# EAGLE board MCB-K64F-v1.0.0 (EAGLE 7.7.0)
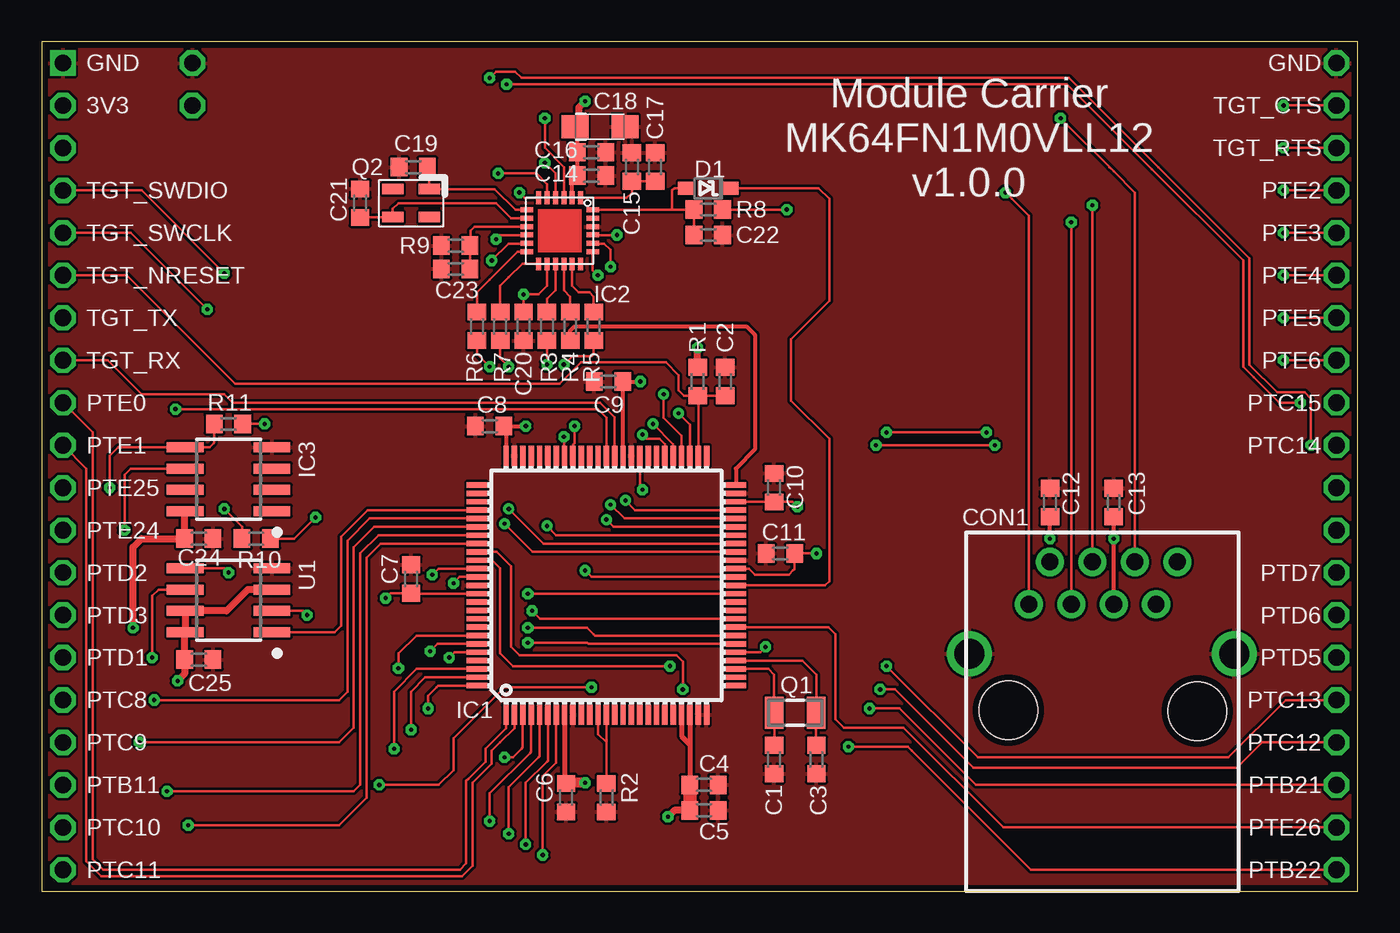
[diagram p0: board, top side]
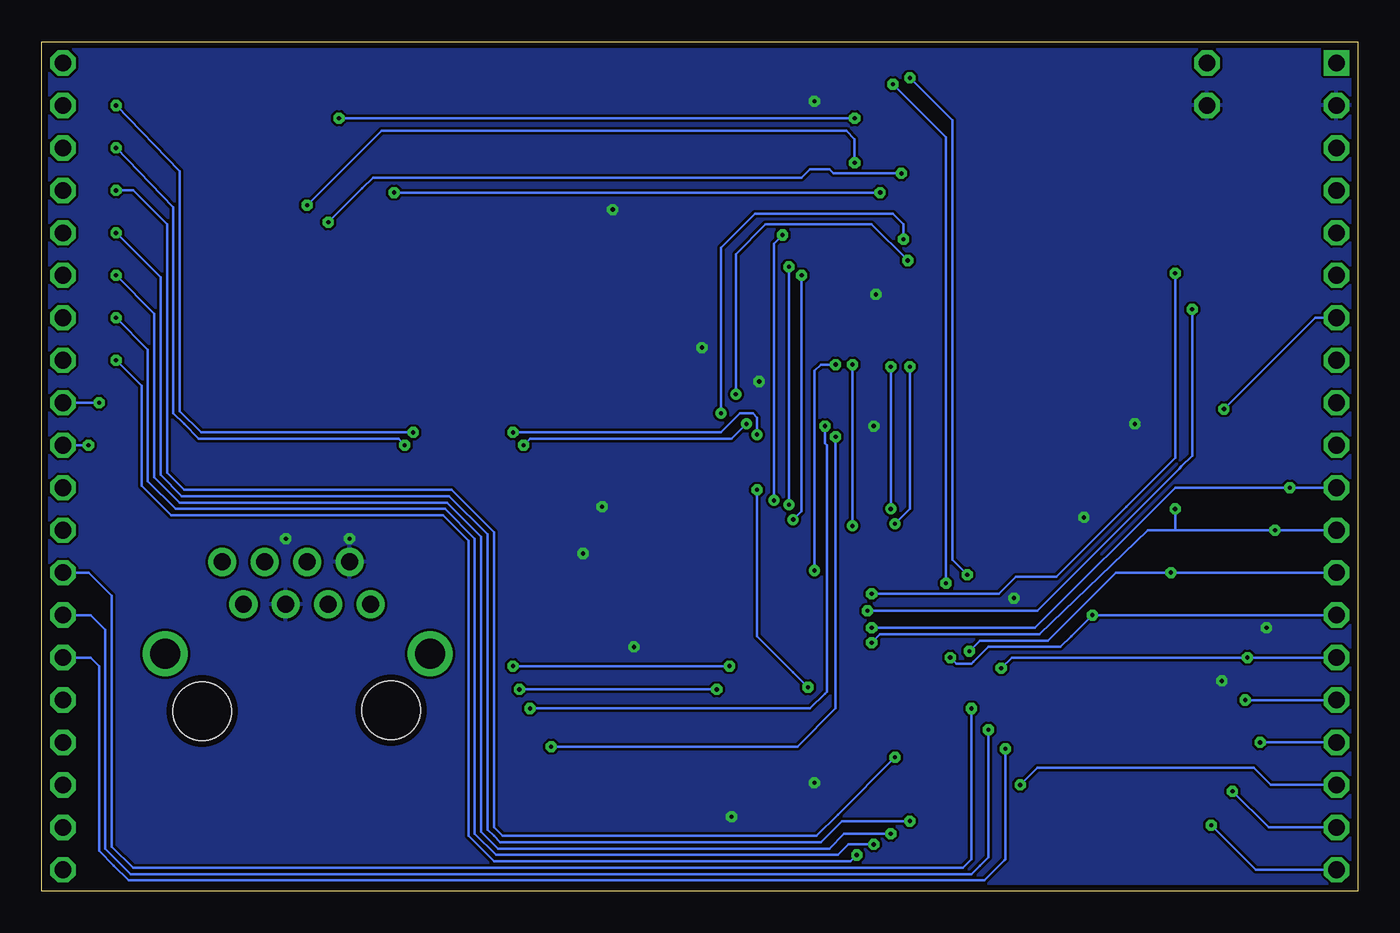
[diagram p1: board, bottom side, seen from below]

Size 78.74 x 50.8 mm. Coordinates in mm from the lower left corner, seen from the top.
Copper layers ((1*16)): Top 0.035mm / dielectric 0.8mm / Bottom 0.035mm
Design rules "mbed-HDK-6-6-2-layer": minimum track width 6mil, minimum drill 9mil, track to track 6mil, track to pad 6mil, pad to pad 6mil, via to via 6mil, smd to smd 6mil, copper to edge 15mil, drill to drill 8mil, minimum pad ring 10mil, minimum via ring 8mil, stop-mask expansion 4mil, vias tented up to drill 0mil, thermal gap 6mil

## Footprints (pad centres in the part's own frame; a part is rotated, then mirrored left to right if it is on the bottom)
0603 = smd 1 x 1.1: 1 -0.85,0; 2 0.85,0
SMC_A = smd 1.6 x 1.4: + -1.5,0; - 1.5,0
RJ45 = drill 1.016 pad 1.676: 1 0,0; 2 -1.27,-2.54; 3 -2.54,0; 4 -3.81,-2.54; 5 -5.08,0; 6 -6.35,-2.54; 7 -7.62,0; 8 -8.89,-2.54 | drill 1.778: P$1 -12.3,2.95; P$2 3.55,2.95 | hole 3.5: -10.09,6.38; 1.21,6.33
BAT60A = smd 1 x 0.8: A 1.3,0; K -1.3,0
LQFP100 = smd 1.2 x 0.32: 1 -7.75,6; 2 -7.75,5.5; 3 -7.75,5; 4 -7.75,4.5; 5 -7.75,4; 6 -7.75,3.5; 7 -7.75,3; 8 -7.75,2.5; 9 -7.75,2; 10 -7.75,1.5; 11 -7.75,1; 12 -7.75,0.5; 13 -7.75,0; 14 -7.75,-0.5; 15 -7.75,-1; 16 -7.75,-1.5; 17 -7.75,-2; 18 -7.75,-2.5; 19 -7.75,-3; 20 -7.75,-3.5; 21 -7.75,-4; 22 -7.75,-4.5; 23 -7.75,-5; 24 -7.75,-5.5; 25 -7.75,-6; 51 7.75,-6; 52 7.75,-5.5; 53 7.75,-5; 54 7.75,-4.5; 55 7.75,-4; 56 7.75,-3.5; 57 7.75,-3; 58 7.75,-2.5; 59 7.75,-2; 60 7.75,-1.5; 61 7.75,-1; 62 7.75,-0.5; 63 7.75,0; 64 7.75,0.5; 65 7.75,1; 66 7.75,1.5; 67 7.75,2; 68 7.75,2.5; 69 7.75,3; 70 7.75,3.5; 71 7.75,4; 72 7.75,4.5; 73 7.75,5; 74 7.75,5.5; 75 7.75,6 | smd 0.32 x 1.2: 26 -6,-7.75; 27 -5.5,-7.75; 28 -5,-7.75; 29 -4.5,-7.75; 30 -4,-7.75; 31 -3.5,-7.75; 32 -3,-7.75; 33 -2.5,-7.75; 34 -2,-7.75; 35 -1.5,-7.75; 36 -1,-7.75; 37 -0.5,-7.75; 38 0,-7.75; 39 0.5,-7.75; 40 1,-7.75; 41 1.5,-7.75; 42 2,-7.75; 43 2.5,-7.75; 44 3,-7.75; 45 3.5,-7.75; 46 4,-7.75; 47 4.5,-7.75; 48 5,-7.75; 49 5.5,-7.75; 50 6,-7.75; 76 6,7.75; 77 5.5,7.75; 78 5,7.75; 79 4.5,7.75; 80 4,7.75; 81 3.5,7.75; 82 3,7.75; 83 2.5,7.75; 84 2,7.75; 85 1.5,7.75; 86 1,7.75; 87 0.5,7.75; 88 0,7.75; 89 -0.5,7.75; 90 -1,7.75; 91 -1.5,7.75; 92 -2,7.75; 93 -2.5,7.75; 94 -3,7.75; 95 -3.5,7.75; 96 -4,7.75; 97 -4.5,7.75; 98 -5,7.75; 99 -5.5,7.75; 100 -6,7.75
QFN-24 = smd 0.75 x 0.3: 1 -1.975,1.25; 2 -1.975,0.75; 3 -1.975,0.25; 4 -1.975,-0.25; 5 -1.975,-0.75; 6 -1.975,-1.25; 13 1.975,-1.25; 14 1.975,-0.75; 15 1.975,-0.25; 16 1.975,0.25; 17 1.975,0.75; 18 1.975,1.25 | smd 0.3 x 0.75: 7 -1.25,-1.975; 8 -0.75,-1.975; 9 -0.25,-1.975; 10 0.25,-1.975; 11 0.75,-1.975; 12 1.25,-1.975; 19 1.25,1.975; 20 0.75,1.975; 21 0.25,1.975; 22 -0.25,1.975; 23 -0.75,1.975; 24 -1.25,1.975
SO8 = smd 0.6 x 2.2: 1 -1.905,-2.6; 2 -0.635,-2.6; 3 0.635,-2.6; 4 1.905,-2.6; 5 1.905,2.6; 6 0.635,2.6; 7 -0.635,2.6; 8 -1.905,2.6
MODULE_DAUGHTER = drill 1 square: 1 0,0 | drill 1 octagon: 2 0,-2.54; 3 0,-5.08; 4 0,-7.62; 5 0,-10.16; 6 0,-12.7; 7 0,-15.24; 8 0,-17.78; 9 0,-20.32; 10 0,-22.86; 11 0,-25.4; 12 0,-27.94; 13 0,-30.48; 14 0,-33.02; 15 0,-35.56; 16 0,-38.1; 17 0,-40.64; 18 0,-43.18; 19 0,-45.72; 20 0,-48.26; 21 76.2,-48.26; 22 76.2,-45.72; 23 76.2,-43.18; 24 76.2,-40.64; 25 76.2,-38.1; 26 76.2,-35.56; 27 76.2,-33.02; 28 76.2,-30.48; 29 76.2,-27.94; 30 76.2,-25.4; 31 76.2,-22.86; 32 76.2,-20.32; 33 76.2,-17.78; 34 76.2,-15.24; 35 76.2,-12.7; 36 76.2,-10.16; 37 76.2,-7.62; 38 76.2,-5.08; 39 76.2,-2.54; 40 76.2,0
FC135 = smd 1.1 x 1.9: X1 -1.25,0; X2 1.25,0
3.2X.2.5 = smd 1.27 x 0.635: P$1 -1.092,-0.838; P$2 1.092,-0.838; P$3 1.092,0.838; P$4 -1.092,0.838
TP50-PTH = drill 1 octagon: TP 0,0

## Placement (x,y rotation side)
C1  18pF  [0603]  43.82,7.87 270 top
C2  100nF  [0603]  40.89,30.48 90 top
C3  18pF  [0603]  46.36,7.87 270 top
C4  100nF  [0603]  39.62,6.35 0 top
C5  100nF  [0603]  39.62,4.83 0 top
C6  100nF  [0603]  31.37,5.59 270 top
C7  100nF  [0603]  22.1,18.67 90 top
C8  100nF  [0603]  26.8,27.81 180 top
C9  100nF  [0603]  33.91,30.48 180 top
C10  100nF  [0603]  43.82,24.13 90 top
C11  100nF  [0603]  44.2,20.19 180 top
C12  100nF  [0603]  60.33,23.24 90 top
C13  100nF  [0603]  64.14,23.24 90 top
C14  100nF  [0603]  32.89,42.8 0 top
C15  100nF  [0603]  35.31,43.31 90 top
C16  100nF  [0603]  32.89,44.2 0 top
C17  100nF  [0603]  36.7,43.31 90 top
C18  4uF7  [SMC_A]  33.4,45.72 0 top
C19  24pF  [0603]  22.22,43.31 180 top
C20  100nF  [0603]  28.83,33.78 270 top
C21  24pF  [0603]  19.05,41.15 90 top
C22  100nF  [0603]  39.88,39.24 0 top
C23  100pF  [0603]  24.77,37.21 180 top
C24  100nF  [0603]  9.4,21.08 0 top
C25  100nF  [0603]  9.4,13.84 0 top
CON1  SI-60002-F  [RJ45]  59.05,17.15 180 top
D1  BAT60A  [BAT60A]  39.88,42.04 180 top
IC1  MK64FN1M0VLL12  [LQFP100]  33.78,18.29 90 top
IC2  KSZ8081RNACA  [QFN-24]  30.99,39.5 270 top
IC3  ATECC608A  [SO8]  11.18,24.64 90 top
MOD1  MODULE_DAUGHTER  [MODULE_DAUGHTER]  1.27,49.53 0 top
Q1  32.768kHz  [FC135]  45.09,10.67 0 top
Q2  25MHz  [3.2X.2.5]  22.1,41.15 180 top
R1  10k  [0603]  39.24,30.48 90 top
R2  10k  [0603]  33.78,5.59 270 top
R3  33R  [0603]  30.23,33.78 270 top
R4  33R  [0603]  31.62,33.78 270 top
R5  33R  [0603]  33.02,33.78 270 top
R6  33R  [0603]  26.04,33.78 270 top
R7  33R  [0603]  27.43,33.78 270 top
R8  10k  [0603]  39.88,40.77 0 top
R9  6k49  [0603]  24.77,38.61 0 top
R10  4k7  [0603]  12.83,21.08 0 top
R11  4k7  [0603]  11.18,27.94 0 top
SS1  FLOSSICORN0.5  [FLOSSICORN-0.5]  13.72,1.91 0 top
TP3  TEST-POINT-50R-PTH  [TP50-PTH]  9.02,49.53 0 top
TP5  TEST-POINT-50R-PTH  [TP50-PTH]  9.02,46.99 0 top
U1  MX25R3235FM1IH0  [SO8]  11.18,17.4 90 top

## Library data of the parts
C1-C23 D1 IC1 IC2 Q1 Q2 R1-R9 TP3 TP5 = mbed-HDK
C24 C25 R10 R11 = mbed-HDK-RLC
CON1 = mbed-HDK-Connector; MF: Stewart Connector; MFN: SI-60002-F; OC-DIGIKEY: 380-1105-ND; OC-NEWARK: 24M7449
IC3 MOD1 SS1 = blackbriar
U1 = blackbriar; MF: Macronix; MFN: MX25R3235FM2IH0; OC-DIGIKEY: 1092-1174-ND

## Nets
50MHZ_REF_CLK: IC1.50 R4.2
+3.3V: C4.1 C5.1 C6.1 C7.1 C8.1 C9.1 C10.1 C11.1 C12.1 C13.1 C14.1 C16.1 C18.+ C20.1 C24.1 C25.1 CON1.2 CON1.5 IC1.8 IC1.22 IC1.23 IC1.30 IC1.40 IC1.48 IC1.61 IC1.75 IC1.89 IC2.2 IC2.14 IC3.8 MOD1.2 R1.2 R8.2 R10.2 R11.2 TP5.TP U1.3 U1.7 U1.8
GND: C1.2 C2.2 C3.2 C4.2 C5.2 C6.2 C7.2 C8.2 C9.2 C10.2 C11.2 C12.2 C13.2 C14.2 C15.2 C16.2 C17.2 C18.- C19.2 C20.2 C21.2 C22.2 C23.2 C24.2 C25.2 CON1.P$1 CON1.P$2 IC1.9 IC1.24 IC1.25 IC1.41 IC1.49 IC1.60 IC1.74 IC1.88 IC2.22 IC3.4 MOD1.1 MOD1.40 R2.2 R9.1 TP3.TP U1.4
N$2: C1.1 IC1.28 Q1.X1
N$3: C3.1 IC1.29 Q1.X2
N$6: IC1.12 IC1.13 R2.1
N$17: IC2.16 R4.1
N$25: CON1.6 IC2.3
N$26: CON1.4 IC2.4
N$27: CON1.3 IC2.5
N$28: CON1.1 IC2.6
N$29: C19.1 IC2.7 Q2.P$1
N$30: C21.1 IC2.8 Q2.P$3
N$31: IC2.12 R6.1
N$32: IC2.13 R7.1
N$33: IC2.17 R5.1
N$42: IC2.15 R3.1
N$43: C22.1 D1.A IC2.24 R8.1
N$44: C15.1 C17.1 IC2.1
N$45: C23.1 IC2.9 R9.2
PHY_CRS_VD: IC1.44 R3.2
PHY_MDC: IC1.54 IC2.11
PHY_MDIO: IC1.53 IC2.10
PHY_NRESET: D1.K IC1.38
PHY_RXD0: IC1.43 R7.2
PHY_RXD1: IC1.42 R6.2
PHY_RXER: IC1.39 R5.2
PHY_TXD0: IC1.46 IC2.20
PHY_TXD1: IC1.47 IC2.21
PHY_TXEN: IC1.45 IC2.19
PTB11: IC1.59 MOD1.18
PTB21: IC1.67 MOD1.23
PTB22: IC1.68 MOD1.21
PTC7: IC1.79 U1.1
PTC8: IC1.80 MOD1.16
PTC9: IC1.81 MOD1.17
PTC10: IC1.82 MOD1.19
PTC11: IC1.83 MOD1.20
PTC12: IC1.84 MOD1.24
PTC13: IC1.85 MOD1.25
PTC14: IC1.86 MOD1.31
PTC15: IC1.87 MOD1.32
PTD1: IC1.94 MOD1.15 U1.6
PTD2: IC1.95 MOD1.13 U1.5
PTD3: IC1.96 MOD1.14 U1.2
PTD5: IC1.98 MOD1.26
PTD6: IC1.99 MOD1.27
PTD7: IC1.100 MOD1.28
PTE0: IC1.1 MOD1.9
PTE1: IC1.2 MOD1.10
PTE2: IC1.3 MOD1.37
PTE3: IC1.4 MOD1.36
PTE4: IC1.5 MOD1.35
PTE5: IC1.6 MOD1.34
PTE6: IC1.7 MOD1.33
PTE24: IC1.31 IC3.6 MOD1.12 R10.1
PTE25: IC1.32 IC3.5 MOD1.11 R11.1
PTE26: IC1.33 MOD1.22
TGT_CTS: IC1.56 MOD1.39
TGT_NRESET: C2.1 IC1.52 MOD1.6 R1.1
TGT_RTS: IC1.55 MOD1.38
TGT_RX: IC1.62 MOD1.8
TGT_SWCLK: IC1.34 MOD1.5
TGT_SWDIO: IC1.37 MOD1.4
TGT_TX: IC1.63 MOD1.7

## Tracks (layer width: path | path; a pad name or v marks a point on that pad's centre or on a via)
50MHZ_REF_CLK
  Top 0.254: R4.2 31.62,33.53 31.88,33.78 35.05,33.78 42.16,33.78 42.67,33.27 42.67,26.42 41.53,25.27 IC1.50
  Top 0.305: IC1.50
+3.3V  (via drill 0.25)
  Top 0.152: 31.28,6.52 C6.1 | IC1.89 22.13,17.79 C7.1 20.87,17.82 v20.57,17.53 | IC1.30 42.99,14.29 v43.31,14.61 | IC1.40 42.31,19.29 42.67,18.92 44.7,18.92 44.96,19.18 45.05,19.27 C11.1 v46.36,20.19 | IC1.48 43.81,23.29 C10.1 44.92,23.28 v45.21,22.99 | 27.78,27.79 C8.1 | 28.94,27.79 v28.96,27.81 | 34.78,30.46 C9.1 | R8.2 v44.58,40.77 | C20.1 v28.83,35.69 29.72,35.69 30.23,36.2 30.23,37.51 IC2.14 | R11.2 v13.33,27.94 | R10.2 15.11,21.08 v16.38,22.35
  Top 0.254: IC1.61 34.78,30.46 | 34.78,30.46 C9.1 | 34.78,30.46 35.66,30.46 v35.81,30.48 | IC1.75 27.78,27.79 28.94,27.79 v28.96,27.81 | v60.33,21.08 C12.1 | CON1.5 v64.14,21.08 C13.1 | 31.8,45.62 C18.+ 32.04,45.58 C16.1 C14.1 31.74,42.49 IC2.2
  Top 0.305: IC1.8 31.28,6.52 | IC1.23 38.78,8.76 | 38.78,8.76 38.78,6.36 C4.1 | IC1.22 38.28,9.26 38.78,8.76
  Top 0.406: C5.1 37.85,4.83 v37.47,4.45 | R1.2 v39.24,32.51 | v32.51,47.24 32.13,46.86 32.13,45.74 C18.+ | IC3.8 8.55,22.71 C24.1 5.97,21.08 5.46,20.57 v5.46,15.75 | U1.3 12.32,18.03 11.05,16.76 U1.7 U1.8 8.55,15.47 C25.1 8.55,12.99 v8.13,12.57
  Top 0.61: v32.51,6.48 31.41,6.48 C6.1
  Top 0.813: C5.1 C4.1
  pour Bottom: 0,0 78.74,0 78.74,50.8 0,50.8
GND
  pour Top: 0,50.8 78.74,50.8 78.74,0 0,0
N$2
  Top 0.152: IC1.28 43.48,13.29 43.82,12.95 43.82,10.69 Q1.X1 43.84,8.86 C1.1
N$3
  Top 0.152: IC1.29 45.52,13.79 46.36,12.95 46.36,10.69 Q1.X2 46.34,8.86 C3.1
N$6
  Top 0.152: IC1.12 33.28,9.39 33.78,8.89 | 33.78,8.89 R2.1 | IC1.13 33.78,8.89
N$17
  Top 0.152: R4.1 31.62,35.56 31.24,35.94 IC2.16
N$25  (via drill 0.25)
  Top 0.152: IC2.3 31.24,42.29 31.24,43.31 30.1,44.45 v30.1,46.23 | CON1.6 65.41,41.78 64.14,43.05 | 64.14,43.05 63.88,43.31 | v60.96,46.23 64.14,43.05
  Bottom 0.152: v60.96,46.23 58.04,46.23 v30.1,46.23
N$26  (via drill 0.25)
  Top 0.152: v30.1,43.56 30.73,42.93 IC2.4 | CON1.4 v62.87,41.02
  Bottom 0.152: v62.87,41.02 58.42,45.47 30.61,45.47 30.1,44.96 v30.1,43.56
N$27  (via drill 0.25)
  Top 0.152: IC2.5 30.24,42.28 29.59,42.93 v27.3,42.93 | CON1.3 v61.6,40.01
  Bottom 0.152: v61.6,40.01 59.56,42.04 58.93,42.67 55.63,42.67 33.27,42.67 32.77,43.18 31.62,43.18 31.37,42.93 28.07,42.93 v27.3,42.93
N$28  (via drill 0.25)
  Top 0.152: IC2.6 28.89,41.47 v28.57,41.78 | CON1.1 59.05,40.39 58.04,41.4 v57.66,41.78
  Bottom 0.152: v57.66,41.78 v28.57,41.78
N$29
  Top 0.152: IC2.7 28.34,40.75 27.1,41.99 Q2.P$1 23.19,43.19 C19.1
N$30
  Top 0.152: IC2.8 28.08,40.25 27.18,41.15 21.34,41.15 21.01,40.82 Q2.P$3 C21.1
N$31
  Top 0.152: IC2.12 28.47,38.25 26.8,36.58 26.04,35.81 R6.1
N$32
  Top 0.152: IC2.13 28.76,37.52 27.94,36.7 27.43,36.2 R7.1
N$33
  Top 0.152: IC2.17 31.74,36.46 31.74,36.21 32.13,35.81 32.77,35.81 33.02,35.56 R5.1
N$42
  Top 0.152: IC2.15 30.74,35.95 30.23,35.43 R3.1
N$43
  Top 0.152: IC2.24 37.72,40.75 | 37.72,40.75 38.26,40.75 39.01,40.75 R8.1 C22.1 | D1.A 37.85,42.04 37.72,41.91 37.72,40.75
N$44
  Top 0.152: C17.1 C15.1 35.31,41.78 35,41.47 IC2.1
N$45
  Top 0.152: C23.1 R9.2 25.65,38.65 25.65,39.5 25.9,39.75 IC2.9
PHY_CRS_VD  (via drill 0.25)
  Top 0.152: IC1.44 30.78,21.29 v30.23,21.84 | v30.23,31.5 R3.2
  Bottom 0.152: v30.23,21.84 v30.23,31.5
PHY_MDC  (via drill 0.25)
  Top 0.152: IC1.54 38.28,27.25 37.21,28.32 v37.21,29.72 | v26.92,37.72 27.94,38.73 29,38.73 IC2.11
  Bottom 0.152: v37.21,29.72 37.21,38.1 35.43,39.88 29.08,39.88 v26.92,37.72
PHY_MDIO  (via drill 0.25)
  Top 0.152: IC1.53 38.78,27.89 v38.1,28.58 | IC2.10 27.43,39.24 v27.18,38.99
  Bottom 0.152: v38.1,28.58 38.1,38.48 36.07,40.51 27.81,40.51 27.18,39.88 v27.18,38.99
PHY_NRESET
  Top 0.152: IC1.38 46.86,18.29 47.12,18.54 47.12,27.05 44.83,29.34 44.83,33.02 47.12,35.31 47.12,41.4 46.48,42.04 D1.K
PHY_RXD0  (via drill 0.25)
  Top 0.152: IC1.43 30.01,20.79 v27.94,22.86 | v27.94,31.37 27.43,31.88 R7.2
  Bottom 0.152: v27.94,22.86 v27.94,31.37
PHY_RXD1  (via drill 0.25)
  Top 0.152: IC1.42 29.37,20.29 v27.69,21.97 | v26.8,31.37 26.04,32.13 R6.2
  Bottom 0.152: v27.69,21.97 26.8,22.86 v26.8,31.37
PHY_RXER  (via drill 0.25)
  Top 0.152: IC1.39 32.9,18.79 v32.51,19.18 | R5.2 33.02,32.13 32.89,32 31.75,32 v31.24,31.5
  Bottom 0.152: v32.51,19.18 32.51,30.99 32.51,31.12 32.13,31.5 v31.24,31.5
PHY_TXD0  (via drill 0.25)
  Top 0.152: IC1.46 34.86,22.29 v34.04,23.11 | v34.04,37.34 34.04,38.35 33.66,38.73 32.98,38.73 IC2.20
  Bottom 0.152: v34.04,23.11 v34.04,37.34
PHY_TXD1  (via drill 0.25)
  Top 0.152: IC1.47 35.51,22.79 v34.93,23.37 | v34.42,39.24 IC2.21
  Bottom 0.152: v34.93,23.37 34.93,38.73 v34.42,39.24
PHY_TXEN  (via drill 0.25)
  Top 0.152: IC1.45 34.22,21.79 v33.78,22.23 | v33.27,36.83 32.96,37.14 IC2.19
  Bottom 0.152: v33.78,22.23 33.27,22.73 v33.27,36.83
PTB11  (via drill 0.25)
  Top 0.152: IC1.59 35.78,24.16 v35.94,24 | v32.89,12.19 27.69,12.19 24.64,9.14 24.64,7.24 23.75,6.35 v20.19,6.35
  Bottom 0.152: v35.94,24 35.94,15.24 33.78,13.08 v32.89,12.19 | MOD1.18 5.21,6.35 6.22,7.37 19.18,7.37 v20.19,6.35
PTB21  (via drill 0.25)
  Top 0.152: MOD1.23 55.88,6.35 51.31,10.92 v49.53,10.92 | IC1.67 31.78,26.7 31.88,26.8 v31.88,27.81
  Bottom 0.152: v49.53,10.92 32.77,10.92 31.88,11.81 31.75,11.94 31.75,26.67 31.88,26.8 v31.88,27.81
PTB22  (via drill 0.25)
  Top 0.152: v31.24,27.18 31.24,26.08 IC1.68 | MOD1.21 59.18,1.27 52.07,8.38 51.82,8.64 v48.26,8.64
  Bottom 0.152: v48.26,8.64 33.53,8.64 31.24,10.92 v31.24,27.18
PTC7
  Top 0.152: IC1.79 19.49,22.79 17.91,21.21 17.91,15.88 17.53,15.49 U1.1
PTC8  (via drill 0.25)
  Top 0.152: IC1.80 19.62,22.29 18.29,20.96 18.29,11.94 17.78,11.43 v6.73,11.43
  Bottom 0.152: v6.73,11.43 MOD1.16
PTC9  (via drill 0.25)
  Top 0.152: IC1.81 19.88,21.79 18.67,20.57 18.67,9.78 17.78,8.89 v5.84,8.89
  Bottom 0.152: v5.84,8.89 MOD1.17
PTC10  (via drill 0.25)
  Top 0.152: IC1.82 20.4,21.29 20.14,21.29 19.05,20.19 19.05,6.35 18.67,5.97 v7.49,5.97
  Bottom 0.152: v7.49,5.97 5.33,3.81 MOD1.19
PTC11  (via drill 0.25)
  Top 0.152: IC1.83 21.42,20.79 20.28,20.79 19.43,19.94 19.43,5.59 17.78,3.94 v8.76,3.94
  Bottom 0.152: v8.76,3.94 6.1,1.27 MOD1.20
PTC12  (via drill 0.25)
  Top 0.152: MOD1.24 73.02,8.89 71.5,7.37 55.75,7.37 51.05,12.06 v50.17,12.06 | IC1.84 27.21,20.29 28.07,19.43 28.07,14.61 28.57,14.1 37.97,14.1 38.35,13.72 v38.35,12.06
  Bottom 0.152: v50.17,12.06 38.99,12.06 v38.35,12.06
PTC13  (via drill 0.25)
  Top 0.152: MOD1.25 74.42,11.43 70.99,8 56.01,8 v50.55,13.46 | IC1.85 26.95,19.79 27.43,19.3 27.43,14.22 28.19,13.46 v37.59,13.46
  Bottom 0.152: v50.55,13.46 39.75,13.46 v37.59,13.46
PTC14  (via drill 0.25)
  Top 0.152: IC1.86 23.73,19.29 v23.37,18.92 | v26.8,48.64 27.18,49.02 28.32,49.02 28.7,48.64 61.47,48.64 66.8,43.31 72.26,37.85 72.26,31.5 73.91,29.85 75.56,29.85 75.95,29.46 75.95,27.18 v75.95,26.67
  Bottom 0.152: v23.37,18.92 24.26,19.81 24.26,20.57 24.26,46.1 v26.8,48.64 | v75.95,26.67 MOD1.31
PTC15  (via drill 0.25)
  Top 0.152: IC1.87 25.01,18.79 v24.64,18.42 | v27.81,48.26 61.34,48.26 66.42,43.18 71.88,37.72 71.88,31.37 72.52,30.73 74.04,29.21 v75.31,29.21
  Bottom 0.152: v24.64,18.42 24.64,45.09 v27.81,48.26 | v75.31,29.21 MOD1.32
PTD1  (via drill 0.25)
  Top 0.152: IC1.94 22.43,15.29 21.34,14.22 v21.34,13.34 | U1.6 6.98,18.03 6.6,17.65 v6.6,13.97
  Bottom 0.152: v21.34,13.34 20.7,13.97 v6.6,13.97 MOD1.15
PTD2  (via drill 0.25)
  Top 0.152: IC1.95 23.69,14.79 v23.24,14.35 | U1.5 10.92,19.3 v11.18,19.05
  Bottom 0.152: MOD1.13 v11.18,19.05 13.84,19.05 14.48,19.05 18.54,14.99 22.61,14.99 v23.24,14.35
PTD3  (via drill 0.25)
  Top 0.152: IC1.96 24.7,14.29 v24.38,13.97 | U1.2 15.62,16.76 v15.88,16.51
  Bottom 0.152: MOD1.14 14.48,16.51 v15.88,16.51 17.14,15.24 17.78,14.61 22.1,14.61 22.99,13.72 23.11,13.59 24,13.59 v24.38,13.97
PTD5  (via drill 0.25)
  Top 0.152: IC1.98 22.43,13.29 21.08,11.94 v21.08,8.51
  Bottom 0.152: MOD1.26 75.82,13.97 75.31,13.46 75.31,2.41 74.42,1.52 73.53,0.63 22.35,0.63 21.14,1.84 21.08,1.91 v21.08,8.51
PTD6  (via drill 0.25)
  Top 0.152: IC1.99 22.95,12.79 22.1,11.94 v22.1,9.65
  Bottom 0.152: MOD1.27 75.82,16.51 74.93,15.62 74.93,2.54 73.41,1.02 23.11,1.02 22.61,1.52 22.1,2.03 v22.1,9.65
PTD7  (via drill 0.25)
  Top 0.152: v23.11,10.92 23.11,11.68 23.62,12.19 23.72,12.29 IC1.100
  Bottom 0.152: MOD1.28 75.95,19.05 74.55,17.65 74.55,2.67 73.28,1.4 23.62,1.4 23.11,1.91 v23.11,10.92
PTE0
  Top 0.152: IC1.1 27.78,9.75 26.54,8.51 26.54,7.75 25.53,6.73 25.4,6.6 25.4,1.65 25.02,1.27 3.68,1.27 3.05,1.91 3.05,22.23 3.05,23.62 3.05,25.02 3.05,27.43 MOD1.9
PTE1
  Top 0.152: IC1.2 28.28,9.74 27.43,8.89 26.92,8.38 26.92,7.62 25.78,6.48 25.78,1.52 25.15,0.89 3.56,0.89 2.67,1.78 2.67,24 2.67,25.27 MOD1.10
PTE2  (via drill 0.25)
  Top 0.152: MOD1.37 v74.3,41.91 | v27.69,8 28.19,8 28.7,8.51 28.78,8.59 IC1.3
  Bottom 0.152: v74.3,41.91 73.28,41.91 71.25,39.88 71.25,25.02 70.23,24 67.69,24 54.23,24 51.69,21.46 51.69,3.81 51.18,3.3 32.38,3.3 31.11,4.57 v27.69,8
PTE3  (via drill 0.25)
  Top 0.152: v26.8,4.19 26.8,5.84 29.21,8.26 29.28,8.33 IC1.4 | v74.3,39.37 MOD1.36
  Bottom 0.152: v26.8,4.19 30.86,4.19 32.13,2.92 34.54,2.92 51.31,2.92 51.69,3.3 52.07,3.68 52.07,21.34 54.36,23.62 70.36,23.62 71.63,24.89 71.63,30.73 71.63,33.53 71.63,36.7 v74.3,39.37
PTE4  (via drill 0.25)
  Top 0.152: IC1.5 29.78,8.83 29.78,8.06 29.72,8 27.94,6.22 v27.94,3.43 | v74.3,36.83 MOD1.35
  Bottom 0.152: v27.94,3.43 30.73,3.43 31.62,2.54 33.91,2.54 51.44,2.54 52.45,3.56 52.45,3.68 52.45,21.21 54.48,23.24 70.48,23.24 72.01,24.77 72.01,30.1 72.01,31.37 72.01,34.54 v74.3,36.83
PTE5  (via drill 0.25)
  Top 0.152: IC1.6 30.28,8.69 30.28,7.8 30.23,7.75 28.96,6.48 v28.96,2.79 | v74.3,34.29 MOD1.34
  Bottom 0.152: v28.96,2.79 30.48,2.79 31.11,2.16 33.4,2.16 51.56,2.16 52.83,3.43 52.83,21.08 54.61,22.86 70.74,22.86 72.39,24.51 72.39,30.61 72.39,32.39 v74.3,34.29
PTE6  (via drill 0.25)
  Top 0.152: MOD1.33 v74.3,31.75 | IC1.7 30.78,8.43 30.78,7.67 29.97,6.86 v29.97,2.16
  Bottom 0.152: v74.3,31.75 72.77,30.23 72.77,24.26 70.99,22.48 54.74,22.48 53.21,20.96 53.21,3.3 51.69,1.78 30.35,1.78 v29.97,2.16
PTE24  (via drill 0.25)
  Top 0.152: v29.08,14.86 32.64,14.86 32.71,14.79 IC1.31 | IC3.6 5.33,25.27 4.95,24.89 v4.95,21.59 | R10.1 11.98,21.8 v10.92,22.86
  Bottom 0.152: MOD1.12 v4.95,21.59 10.92,21.59 | 10.92,21.59 12.57,21.59 19.05,15.37 21.34,15.37 28.57,15.37 v29.08,14.86 | v10.92,22.86 10.92,21.59
PTE25  (via drill 0.25)
  Top 0.152: v29.08,15.75 32.64,15.75 33.02,15.37 33.1,15.29 IC1.32 | v4.06,24.13 4.06,26.04 4.57,26.54 IC3.5 10.03,26.54 10.29,26.8 10.33,26.84 R11.1
  Bottom 0.152: MOD1.11 v4.06,24.13 10.92,24.13 19.3,15.75 v29.08,15.75
PTE26
  Top 0.152: MOD1.22 57.53,3.81 51.56,9.78 48.9,9.78 48.01,9.78 47.5,10.29 47.5,15.37 47.08,15.79 IC1.33
TGT_CTS  (via drill 0.25)
  Top 0.152: IC1.56 37.28,26.73 36.96,27.05 36.2,27.05 v35.94,27.3 | MOD1.39 v74.3,46.99 | v50.55,27.43 v56.52,27.43
  Bottom 0.152: v74.3,46.99 70.48,43.05 70.48,41.78 70.48,38.23 70.48,28.7 69.21,27.43 v56.52,27.43 | v35.94,27.3 35.94,28.32 36.2,28.58 36.96,28.58 38.1,27.43 49.53,27.43 v50.55,27.43
TGT_NRESET
  Top 0.152: IC1.52 39.28,28.21 39.28,29.59 R1.1 | R1.1 C2.1 | MOD1.6 5.08,36.83 11.56,30.35 12.83,30.35 30.99,30.35 32.26,31.62 37.34,31.62 38.1,30.86 38.1,29.97 38.44,29.63 R1.1
TGT_RTS  (via drill 0.25)
  Top 0.152: IC1.55 37.78,26.73 v36.58,27.94 | MOD1.38 v74.3,44.45 | v57.02,26.67 v49.91,26.67
  Bottom 0.152: v74.3,44.45 70.87,40.89 70.87,38.23 70.87,28.58 70.23,27.94 69.34,27.05 57.4,27.05 v57.02,26.67 | v36.58,27.94 37.47,27.05 49.53,27.05 v49.91,26.67
TGT_RX
  Top 0.152: IC1.62 34.28,28.33 33.4,29.21 11.43,29.21 10.92,29.72 7.37,29.72 5.97,29.72 3.94,31.75 MOD1.8
TGT_SWCLK  (via drill 0.25)
  Top 0.152: IC1.34 29.81,16.29 v29.34,16.76 | v9.91,34.8 5.33,39.37 MOD1.5
  Bottom 0.152: v29.34,16.76 19.18,16.76 10.67,25.27 | 10.67,25.27 10.54,25.4 | 10.54,25.4 10.67,25.27 | 10.54,25.4 9.91,26.04 v9.91,34.8
TGT_SWDIO  (via drill 0.25)
  Top 0.152: IC1.37 29.09,17.79 v29.08,17.78 | v10.92,36.96 5.97,41.91 MOD1.4
  Bottom 0.152: v29.08,17.78 21.46,17.78 20.45,18.8 18.03,18.8 13.84,22.99 10.92,25.91 v10.92,36.96
TGT_TX  (via drill 0.25)
  Top 0.152: IC1.63 33.78,28.32 33.27,28.83 v8,28.83
  Bottom 0.152: MOD1.7 2.54,34.29 v8,28.83

## Text on the board
tPlace: GND / 3V3 / / TGT_SWDIO / TGT_SWCLK / TGT_NRESET / TGT_TX / TGT_RX / PTE0 / PTE1 / PTE25 / PTE24 / PTD2 / PTD3 / PTD1 / PTC8 / PTC9 / PTB11 / PTC10 / PTC11 | GND / TGT_CTS / TGT_RTS / PTE2 / PTE3 / PTE4 / PTE5 / PTE6 / PTC15 / PTC14 / / / PTD7 / PTD6 / PTD5 / PTC13 / PTC12 / PTB21 / PTE26 / PTB22 | Module Carrier / MK64FN1M0VLL12 / v1.0.0